# EAGLE board G530 Test Hookup (EAGLE 9.7.0)

Size 265.59 x 204.11 mm. Coordinates in mm from the lower left corner, seen from the top.
Outline: 0,0 265.6,0 265.6,204.11 0,204.11 0,0
Copper layers (1*16): Top 0.035mm / dielectric 1.5mm / Bottom 0.035mm
Design rules "default": minimum track width 6mil, minimum drill 0.35mm, track to track 6mil, track to pad 6mil, pad to pad 6mil, via to via 6mil, smd to smd 6mil, copper to edge 40mil, drill to drill 6mil, minimum pad ring 10mil, minimum via ring 8mil, stop-mask expansion 4mil, vias tented up to drill 0mil, thermal gap 10mil

## Footprints (pad centres in the part's own frame; a part is rotated, then mirrored left to right if it is on the bottom)
HA-06-SM065 = drill 1 pad 1.676: 1 -2.54,-2.54; 2 0,2.54; 3 2.54,-2.54
SWITCH-MOMENTARY-PTH-6.5MM = drill 1.016 pad 1.88: 1 -3.251,2.261; 2 3.251,2.261; 3 -3.251,-2.261; 4 3.251,-2.261
ARDUINO-UNO-R3-SHIELD = drill 1.016 pad 1.88: 3.3V 24.13,-2.54; 5V 24.13,0; A0 24.13,12.7; A1 24.13,15.24; A2 24.13,17.78; A3 24.13,20.32; A4 24.13,22.86; A5 24.13,25.4; AREF -24.13,-13.97; D2 -24.13,20.32; D3 -24.13,17.78; D4 -24.13,15.24; D5 -24.13,12.7; D6 -24.13,10.16; D7 -24.13,7.62; D8 -24.13,3.81; D9 -24.13,1.27; D10 -24.13,-1.27; D11 -24.13,-3.81; D12 -24.13,-6.35; D13 -24.13,-8.89; GND@0 24.13,2.54; GND@1 24.13,5.08; GND@2 -24.13,-11.43; IOREF 24.13,-7.62; NC 24.13,-10.16; RES 24.13,-5.08; RX -24.13,25.4; SCL -24.13,-19.05; SDA -24.13,-16.51; TX -24.13,22.86; VIN 24.13,7.62

## Placement (x,y rotation side)
RPOTCOM1_VOLUME1  10k  [HA-06-SM065]  30.89,8.49 0 top
RPOTDUAL_ENCODER_11  10k  [HA-06-SM065]  21.53,119.51 0 top
RPOTDUAL_ENCODER_22  10k  [HA-06-SM065]  67.54,119.05 0 top
RPOTNAV1_VOLUME1  10k  [HA-06-SM065]  72.21,8.26 0 top
SCDI  SWITCH_MOMENTARY  [SWITCH-MOMENTARY-PTH-6.5MM]  122.6,127.97 90 top
SCLR  SWITCH_MOMENTARY  [SWITCH-MOMENTARY-PTH-6.5MM]  256.54,124.43 90 top
SCOM_SELECT  SWITCH_MOMENTARY  [SWITCH-MOMENTARY-PTH-6.5MM]  106.63,180.25 90 top
SDIRECT  SWITCH_MOMENTARY  [SWITCH-MOMENTARY-PTH-6.5MM]  255.75,162.91 270 top
SENT  SWITCH_MOMENTARY  [SWITCH-MOMENTARY-PTH-6.5MM]  257.34,106.22 90 top
SFPL  SWITCH_MOMENTARY  [SWITCH-MOMENTARY-PTH-6.5MM]  189.31,127.11 90 top
SMENU  SWITCH_MOMENTARY  [SWITCH-MOMENTARY-PTH-6.5MM]  256,143.71 90 top
SMSG  SWITCH_MOMENTARY  [SWITCH-MOMENTARY-PTH-6.5MM]  168.42,127.38 90 top
SOBS  SWITCH_MOMENTARY  [SWITCH-MOMENTARY-PTH-6.5MM]  144.32,127.67 90 top
SPROC  SWITCH_MOMENTARY  [SWITCH-MOMENTARY-PTH-6.5MM]  228.68,126.57 90 top
SRANGE_DOWN  SWITCH_MOMENTARY  [SWITCH-MOMENTARY-PTH-6.5MM]  255.47,179.33 90 top
SRANGE_UP  SWITCH_MOMENTARY  [SWITCH-MOMENTARY-PTH-6.5MM]  255.73,196.74 90 top
SVNAV  SWITCH_MOMENTARY  [SWITCH-MOMENTARY-PTH-6.5MM]  208.86,127.11 90 top
SVNAV_SELECT  SWITCH_MOMENTARY  [SWITCH-MOMENTARY-PTH-6.5MM]  106.46,162.11 90 top
U1  ARDUINO-UNO-R3-SHIELD  [ARDUINO-UNO-R3-SHIELD]  185.02,70.82 270 top
U2  ARDUINO-UNO-R3-SHIELD  [ARDUINO-UNO-R3-SHIELD]  47.88,67.81 270 top

## Library data of the parts
RPOTCOM1_VOLUME1 RPOTDUAL_ENCODER_11 RPOTDUAL_ENCODER_22 RPOTNAV1_VOLUME1 SCDI SCLR SCOM_SELECT SDIRECT SENT SFPL SMENU SMSG SOBS SPROC SRANGE_DOWN SRANGE_UP SVNAV SVNAV_SELECT U1 U2 = Tinkercad

## Nets
U1_D2: SCLR.3 U1.D2
U1_D3: SMENU.3 U1.D3
U1_D4: SDIRECT.2 U1.D4
U1_D5: SRANGE_DOWN.3 U1.D5
U1_D6: SRANGE_UP.3 U1.D6
U1_D7: SPROC.3 U1.D7
U1_D8: SVNAV.3 U1.D8
U1_D9: SFPL.3 U1.D9
U1_D10: SMSG.3 U1.D10
U1_D11: SOBS.3 U1.D11
U1_D12: SCDI.3 U1.D12
U1_D13: SCOM_SELECT.3 SVNAV_SELECT.3 U1.D13
U1_GND: SCDI.1 SCLR.1 SCOM_SELECT.1 SDIRECT.4 SENT.1 SFPL.1 SMENU.1 SMSG.1 SOBS.1 SPROC.1 SRANGE_DOWN.1 SRANGE_UP.1 SVNAV.1 SVNAV_SELECT.1 U1.GND@0 U1.GND@1 U1.GND@2
U1_TX: SENT.3 U1.TX
U2_5V: RPOTCOM1_VOLUME1.1 RPOTDUAL_ENCODER_11.1 RPOTDUAL_ENCODER_22.1 RPOTNAV1_VOLUME1.1 U2.5V
U2_A0: RPOTCOM1_VOLUME1.2 U2.A0
U2_A1: RPOTNAV1_VOLUME1.2 U2.A1
U2_D2: RPOTDUAL_ENCODER_22.2 U2.D2
U2_D13: RPOTDUAL_ENCODER_11.2 U2.D13
U2_GND: RPOTCOM1_VOLUME1.3 RPOTDUAL_ENCODER_11.3 RPOTDUAL_ENCODER_22.3 RPOTNAV1_VOLUME1.3 U2.GND@0 U2.GND@1 U2.GND@2

## Tracks (layer width: path | path; a pad name or v marks a point on that pad's centre or on a via)
U1_D2  (1 unrouted)
U1_D3  (1 unrouted)
U1_D4  (1 unrouted)
U1_D5  (1 unrouted)
U1_D6  (1 unrouted)
U1_D7  (1 unrouted)
U1_D8  (1 unrouted)
U1_D9  (1 unrouted)
U1_D10  (1 unrouted)
U1_D11  (1 unrouted)
U1_D12  (1 unrouted)
U1_D13  (2 unrouted)
U1_GND  (16 unrouted)
U1_TX  (1 unrouted)
U2_5V  (4 unrouted)
U2_A0  (1 unrouted)
U2_A1  (1 unrouted)
U2_D2  (1 unrouted)
U2_D13  (1 unrouted)
U2_GND  (6 unrouted)